# Altium PCB Ada.PcbDoc
Units mm, origin at the board's own origin, x right, y up, seen from the top; angles counter-clockwise.
Board outline 39.5 x 32.44 mm, 2 copper layers (Top Layer, Bottom Layer), stack 1.619 mm thick; 23 components, 15 nets, 70 pads, 12 vias.
Unrouted connection lines stored in the file: 72.
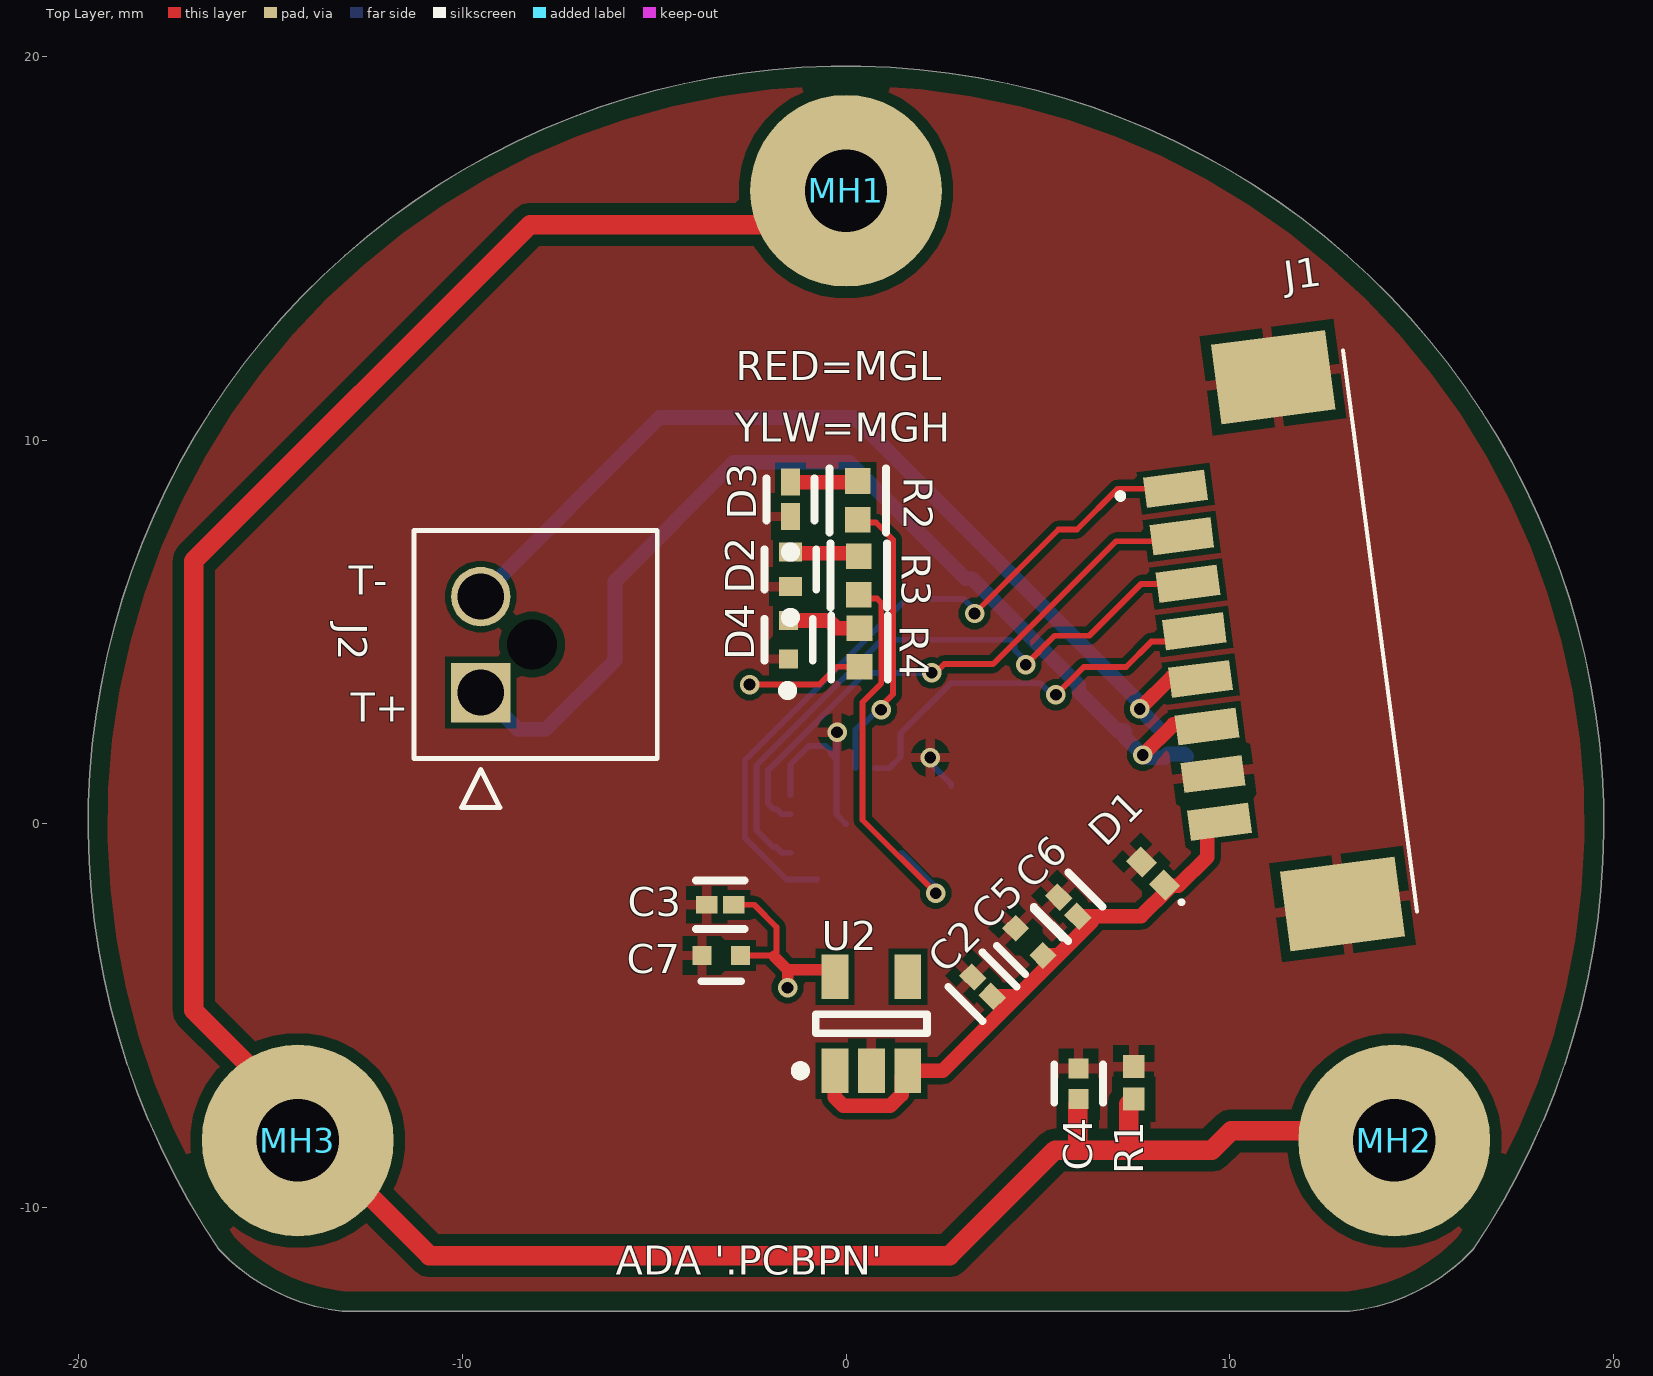
[diagram p0: Top Layer view]
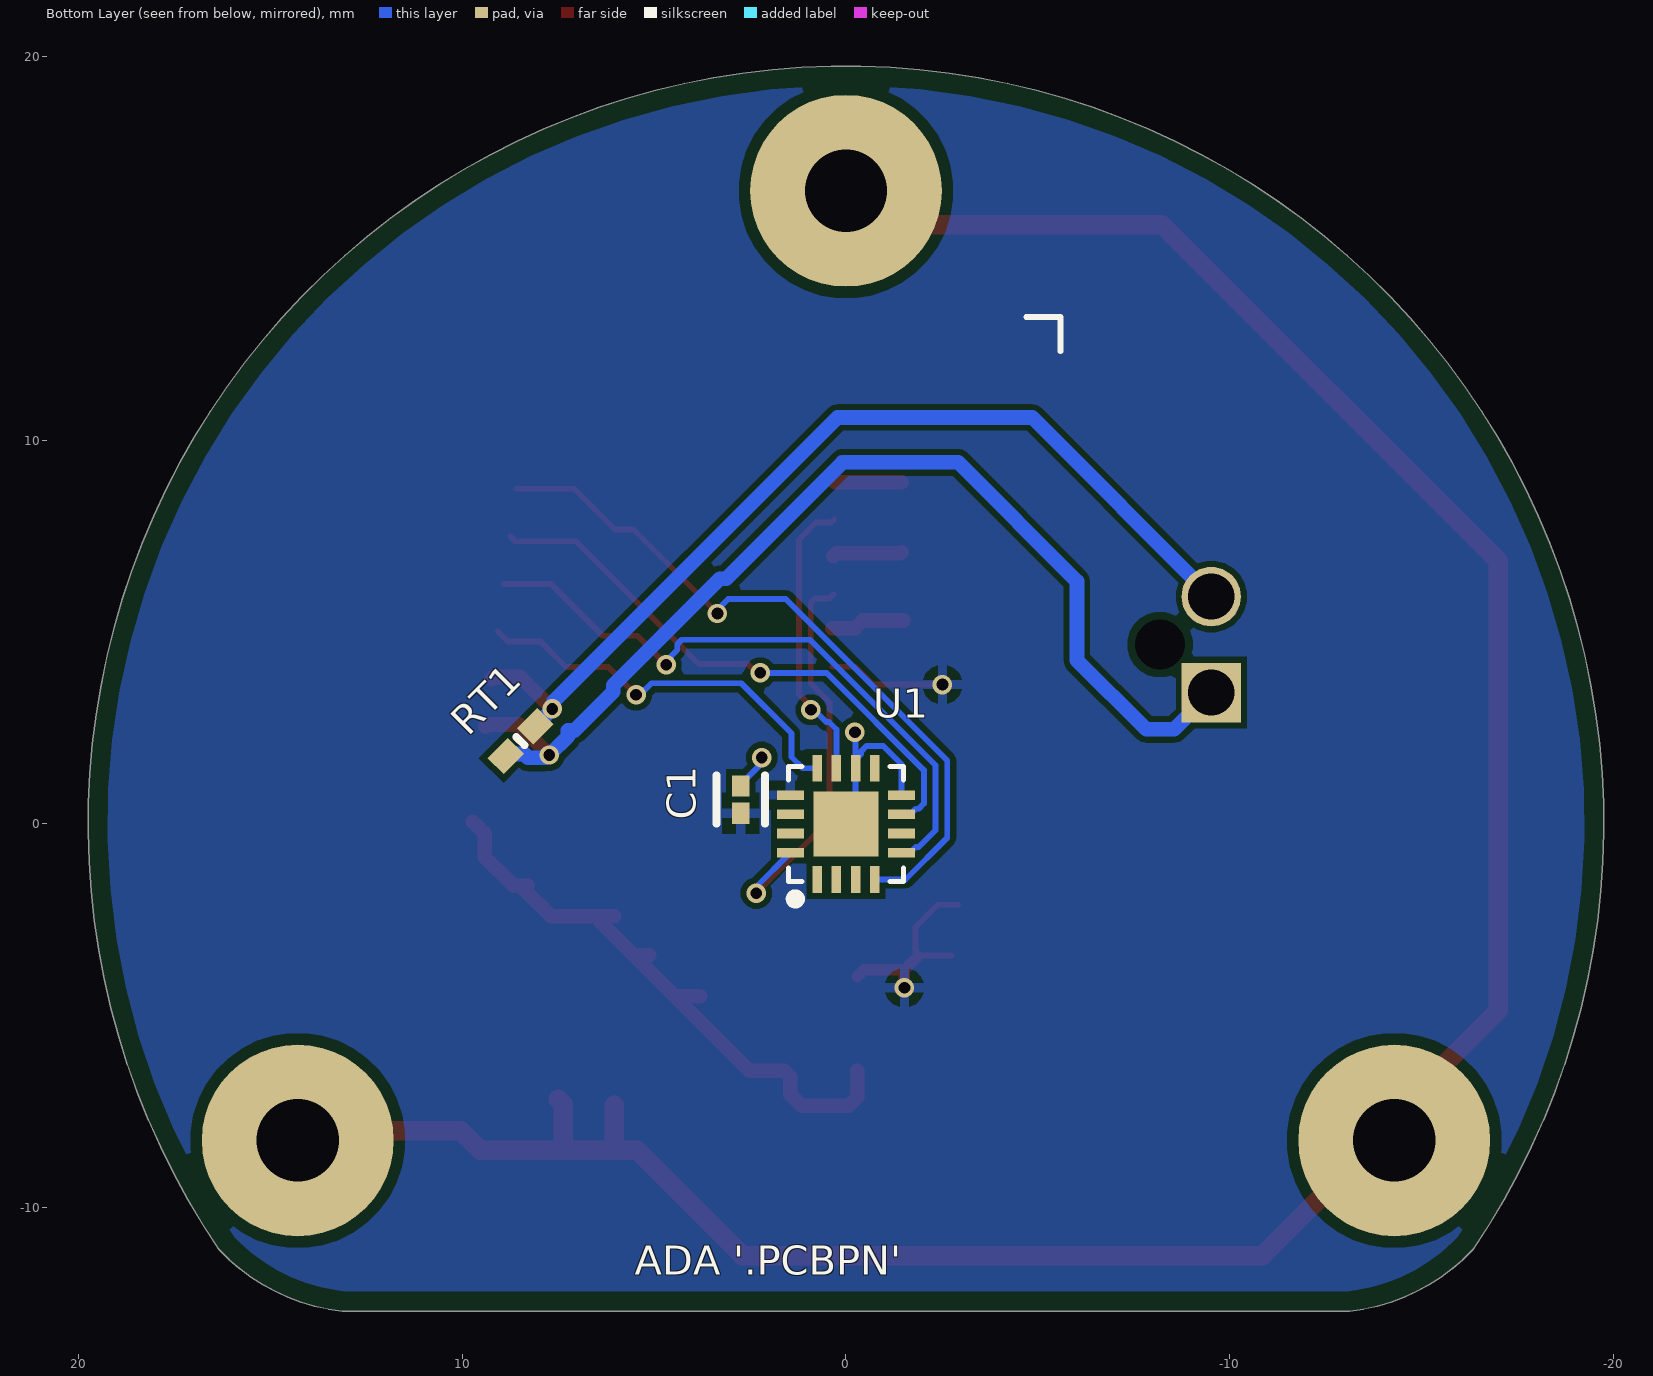
[diagram p1: Bottom Layer view, seen from below]
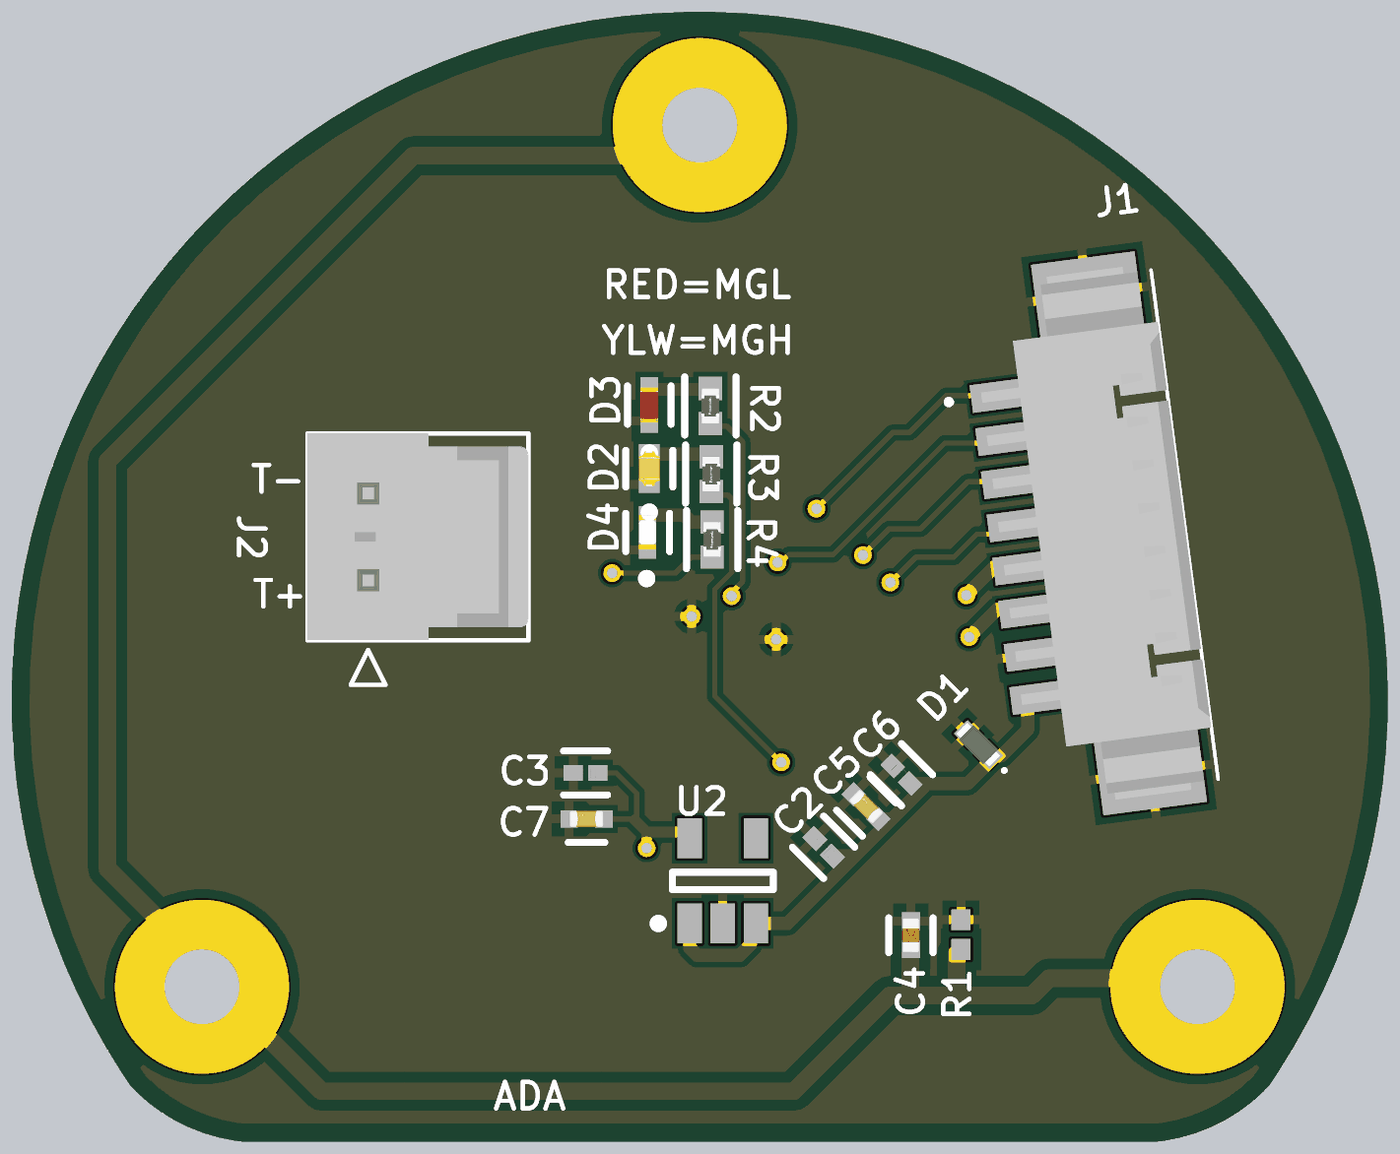
[diagram p2: 3D render of the assembled board from above, using the file's embedded part models]
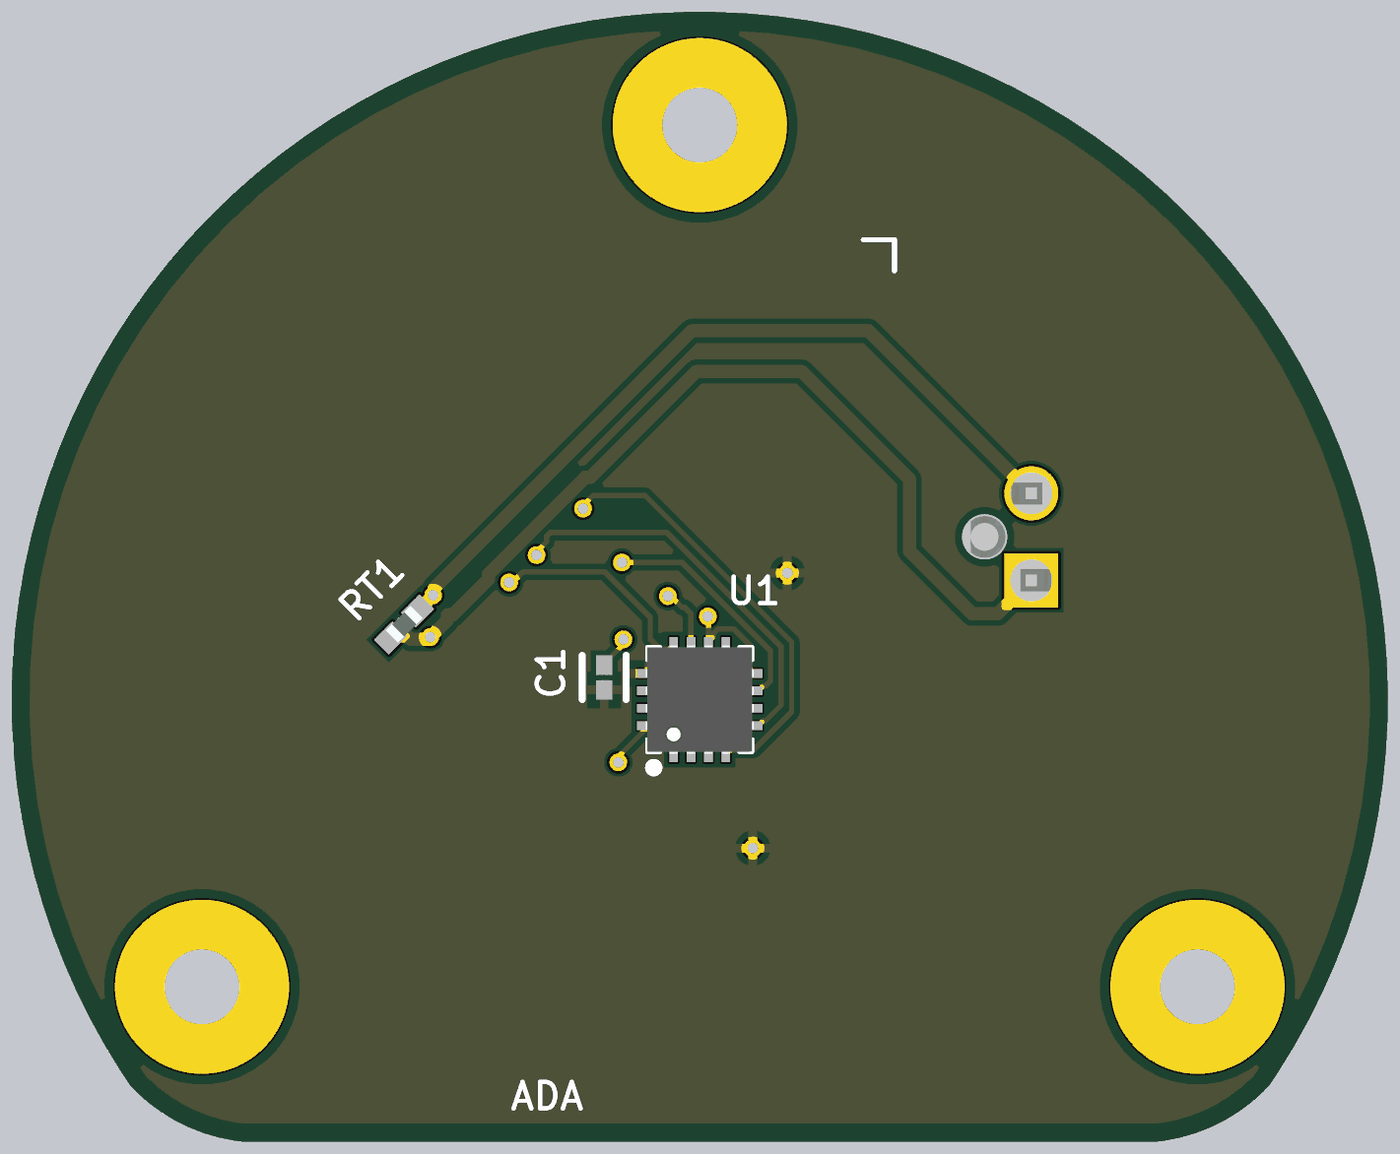
[diagram p3: 3D render of the assembled board from below, using the file's embedded part models]

## Layer stack, top to bottom
Top Solder: solder mask 0.0254, SM-003, Dk 4
Top Layer: signal copper 0.0343
Core1: core 1.55, 370HR, Dk 4.6
Bottom Layer: signal copper 0.0343
Bottom Solder: solder mask 0.0254, SM-003, Dk 4

## Board outline
-16.336,-11.1 ccw(c-12.569,-7.549) -13.129,-12.695 10.104,-12.695 13.129,-12.695 ccw(c12.569,-7.549) 16.336,-11.1 ccw(c0,0)

## Design rules (kind name [scope] priority, off if disabled: settings)
AcuteAngle [All] p1: minimum=6.00000000000000E+0001 checktracksonly=FALSE
AssemblyTestPointUsage [All] p1: allowmultiple=TRUE
AssemblyTestpoint "AssemblyTestpoint - Gorilla" [All] p1: testpointundercomponent=FALSE minsize=0.559 maxsize=2.54 preferedsize=1.524 minholesize=0 maxholesize=1.016 preferedholesize=0.813 testpointgrid=0.127 usegrid=FALSE gridoriginx=12.778 gridoriginy=12.772 gridtolerance=0 allowsidetop=TRUE allowsidebottom=TRUE minspacing=0.127
AssemblyTestpoint "AssemblyTestpoint - Whizz" [All] p2 off: testpointundercomponent=FALSE minsize=0.66 maxsize=2.54 preferedsize=1.524 minholesize=0 maxholesize=1.016 preferedholesize=0.813 testpointgrid=0.127 usegrid=FALSE gridoriginx=12.778 gridoriginy=12.772 gridtolerance=0 allowsidetop=TRUE allowsidebottom=TRUE minspacing=0.127
BoardOutlineClearance [All] p1: gap=0.203 ignorepadtopadclearanceinfootprint=FALSE except(0.254: Text-OutlineEdge; 0.508: Arc-OutlineEdge Track-OutlineEdge SMDPad-OutlineEdge THPad-OutlineEdge Via-OutlineEdge Fill-OutlineEdge Poly-OutlineEdge Region-OutlineEdge)
Clearance Clearance31-100V [(InNetClass('Chassis')) vs NOT (InNetClass('Chassis'))] p1: gap=0.635 ignorepadtopadclearanceinfootprint=FALSE // Outside clearance per IPC-2221
Clearance Clearance_non_plated [(HoleDiameter > 0) And (PadIsPlated = 'False')] p2: gap=0.203 ignorepadtopadclearanceinfootprint=FALSE except(0: Arc-Hole Track-Hole SMDPad-Hole THPad-Hole Via-Hole Fill-Hole Poly-Hole Region-Hole Text-Hole)
Clearance Clearance100OhmDiff [(InDifferentialPairClass('All Differential Pairs')) vs (Not (InDifferentialPairClass('All Differential Pairs'))) And Not InNetClass('Power')] p3: gap=0.508 ignorepadtopadclearanceinfootprint=FALSE except(0: Arc-Hole Track-Hole SMDPad-Hole THPad-Hole Via-Hole Fill-Hole Poly-Hole Region-Hole Text-Hole)
Clearance Clearance50OhmSE [InNetClass('SE50Ohm') vs Not InNetClass('SE50Ohm') And Not InNetClass('Power')] p4: gap=0.508 ignorepadtopadclearanceinfootprint=FALSE except(0: Arc-Hole Track-Hole SMDPad-Hole THPad-Hole Via-Hole Fill-Hole Poly-Hole Region-Hole Text-Hole)
Clearance Clearance_Outerlayer [OnOutside] p5: gap=0.152 ignorepadtopadclearanceinfootprint=FALSE
Clearance Clearance_Innerlayer [OnMid] p6: gap=0.152 ignorepadtopadclearanceinfootprint=FALSE
DiffPairsRouting 100OhmDiffPairsRouting [InDifferentialPairClass('All Differential Pairs')] p1: maxlimit=0.254 minlimit=0.127 mostfreqgap=0.191 toplayer_minwidth=0.127 toplayer_maxwidth=0.381 toplayer_prefwidth=0.159 bottomlayer_minwidth=0.127 bottomlayer_maxwidth=0.381 bottomlayer_prefwidth=0.159 maxuncoupledlength=12.7
FabricationTestPointUsage [All] p1: valid=0 allowmultiple=TRUE
FabricationTestpoint [All] p1: side=3 testpointundercomponent=TRUE minsize=0.127 maxsize=2.54 preferedsize=1.524 minholesize=0 maxholesize=1.016 preferedholesize=0.813 testpointgrid=0.127 allowsidetop=TRUE allowsidebottom=TRUE usegrid=FALSE gridoriginx=12.778 gridoriginy=12.772 gridtolerance=0
FanoutControl Fanout_Small [(CompPinCount < 5)] p4: bgadir=Out bgaviamode=Centered fanoutstyle=Auto fanoutdirection=OutOnly viagrid=0.025 // Fanout_Small (Default Rule)
Height [All] p1: minheight=0 maxheight=76.2 prefheight=12.7
HoleSize [All] p1: absolutevalues=TRUE maxlimit=3.962 minlimit=0.203 maxpercent=80.000 minpercent=20.000
MatchedLengths [All] p1: tolerance=2.54 checknetsindiffpair=TRUE checkdiffpairvsdiffpair=FALSE checkxsignals=FALSE checkothers=FALSE
MinimumAnnularRing [All] p1: minimumring=0.089
MinimumSolderMaskSliver [All] p1: minsoldermaskwidth=0.076
PermittedLayers ThroughHole [IsDIP] p1: toplayerpermitted=TRUE bottomlayerpermitted=FALSE // Single sided through hole only
PermittedLayers [All] p2: toplayerpermitted=TRUE bottomlayerpermitted=TRUE
PlaneClearance [All] p1: clearance=0.203
PolygonConnect [All] p1: connectstyle=Relief reliefconductorwidth=0.254 reliefentries=4 polygonreliefangle="90 Angle" airgapwidth=0.254
RoutingVias [All] p1: holewidth=0.305 width=0.508 viastyle="Through Hole" minholewidth=0.203 minwidth=0.406 maxholewidth=0.457 maxwidth=0.66
SMDEntry [All] p1: side=TRUE corner=TRUE anyangle=TRUE
SMDNeckDown "SMDNeckDown SolderBump" [HasFootprintPad('SolderBump','1')=True] p1: percent=200.000
SMDNeckDown [(HasFootprintPad('SolderBump','1')=False) and (IsPad=true)] p2: percent=75.000
SMDToCorner [All] p1: distance=100000
SilkToSilkClearance [All] p1: silktosilkclearance=0
SilkToSolderMaskClearance [IsPad] p1: minsilkscreentomaskgap=0.025 clearancetoexposedcopper=FALSE
SolderMaskExpansion [All] p1: expansion=0.076 istentingtop=FALSE
ViasUnderSMD [All] p1: allowed=FALSE
Width Width100OhmDiff [(InDifferentialPairClass('All Differential Pairs'))] p1: maxlimit=25.4 minlimit=0.127 preferedwidth=0.159 minimp=50.000000 maximp=50.000000 favimp=50.000000
Width Width50Ohm [InNetClass('SE50ohm')] p2: maxlimit=0.241 minlimit=0.127 preferedwidth=0.241 minimp=50.000000 maximp=50.000000 favimp=50.000000
Width Width_Innerlayer [OnMid] p3: maxlimit=25.4 minlimit=0.102 preferedwidth=0.127
Width Width__Outerlayer [OnOutside] p4: maxlimit=25.4 minlimit=0.127 preferedwidth=0.152
18 further rules are at their usual default settings.

## Classes and differential pairs
net class Chassis: NetC4_1

## Components (designator, comment, footprint, x,y, rotation, side; value= is the part's Value field where it differs from the comment)
C1 "CL03A105MQ3CSNC" FP-CL03-IPC_A 2.743,0.635 r90 bottom
C2 "CL03A105MQ3CSNC" FP-CL03-IPC_A 3.556,-4.242 r135 top
C3 "CL03A105MQ3CSNC" FP-CL03-IPC_A -3.277,-2.108 r180 top
C4 "C0402C103M5RACTU" FP-C0402-BB-MFG 6.062,-6.77 r90 top value="10,000 pF"
C5 "CC0402KRX5R9BB104" FP-CC0402-MFG 4.775,-3.073 r135 top value="100 nF"
C6 "CL03A105MQ3CSNC" FP-CL03-IPC_A 5.791,-2.159 r135 top
C7 "CC0402KRX5R9BB104" FP-CC0402-MFG -3.251,-3.429 r180 top value="100 nF"
D1 "RCLAMP1521PQTCT" RCLAMP1521PQTCT 8.001,-1.295 r135 top locked
D2 "SML-P11DTT86R" FP-SML-P11-MFG -1.448,6.633 r90 top
D3 "APHHS1005SURCK" FP-APHHS1005SURCK-MFG -1.448,8.458 r90 top
D4 "QBLP595-IB" FP-QBLP595-IB-MFG -1.499,4.801 r90 top
J1 "10114830-11108LF" 1011483011108LF 11.836,4.75 r97.5 top locked
J2 "1053092302" 105309YY02_U -9.519,3.424 r90 top
MH1 "MH" MH_1.6MM#1 0,13.429 r0 top
MH2 "MH" MH_1.6MM#2 5.933,-8.25 r0 top
MH3 "MH" MH_1.6MM#3 4.176,-6.378 r0 top
R1 "432K" RESC1005X40X25NL05T10 7.5,-6.75 r270 top
R2 "ERJ-2RKF2000X" FP-ERJ2RK-IPC_A 0.305,8.433 r90 top
R3 "ERJ-2RKF2000X" FP-ERJ2RK-IPC_A 0.33,6.477 r90 top
R4 "ERJ-2RKF2000X" FP-ERJ2RK-IPC_A 0.356,4.597 r90 top
RT1 "NCP15XH103F03RC" THRMC1005X55N 8.484,2.159 r135 bottom
U1 "SENSOR_MPS_MA732" QFN50P300X300X100-16-TP 0,0 r90 bottom locked
U2 "ADP150AUJZ-3.3-R7" ADI-UJ-5_M 0.66,-5.207 r90 top

## Footprints (in the part's own frame and the unit in brackets; to place one, negate y for a bottom-side part, rotate by r counter-clockwise, add the part's x,y. Pads: shape width x height; smd on the part's side, far side on the other; paste and mask are expansions set on the pad)
105309YY02_U [mm]
  rect 1.55x1.55 hole 1.2: 1(0,0)
  round 1.55 hole 1.2: 2(2.5,0)
  round 0.65 hole 1.3 unplated: 3(1.25,-1.34)
  silkscreen extent -3,-4.6 4.22,1.74, body extent -1.72,-4.6 4.22,1.74, height 10.52
1011483011108LF [mm]
  rect 0.8x1.6 smd: 1(4.375,2.7) 2(3.125,2.7) 3(1.875,2.7) 4(0.625,2.7) 5(-0.625,2.7) 6(-1.875,2.7) 7(-3.125,2.7) 8(-4.375,2.7)
  rect 2.1x3 smd: MP1(6.925,-0.2) MP2(-6.925,-0.2)
  silkscreen extent -7.38,-2.1 7.37,4.2, body extent -7.57,-2.1 7.58,3.2, height 3.49
ADI-UJ-5_M [mm] "SOT23, 5-Leads, Body 2.9x1.6mm, Pitch 0.95mm, IPC Low Density"
  rect 1.15x0.7 smd: 1(-1.225,0.95) 2(-1.225,0) 3(-1.225,-0.95) 4(1.225,-0.95) 5(1.225,0.95)
  silkscreen extent -1.35,-1.45 0.25,1.97, body extent -0.8,-1.45 0.8,1.45, height 1
FP-APHHS1005SURCK-MFG [mm]
  rect 0.7x0.5 smd paste+0 mask+0: 1(-0.45,0) 2(0.45,0)
  silkscreen extent -1.5,-0.63 0.55,0.63, body extent -0.9,-0.4 0.9,0.4, height 0.25
FP-C0402-BB-MFG [mm]
  rect 0.52x0.52 smd paste+0 mask+0: 1(-0.4,0) 2(0.4,0)
  silkscreen extent -0.5,-0.64 0.5,0.64, body extent -0.8,-0.4 0.8,0.4, height 0.25
FP-CC0402-MFG [mm]
  rect 0.5x0.5 smd paste+0 mask+0: 1(-0.5,0) 2(0.5,0)
  silkscreen extent -0.53,-0.68 0.53,0.67, body extent -0.87,-0.47 0.87,0.47, height 0.25
FP-CL03-IPC_A [mm]
  rect 0.554x0.463 smd paste+0 mask+0: 1(-0.354,0) 2(0.354,0)
  silkscreen extent -0.63,-0.63 0.63,0.63, body extent -0.3,-0.15 0.3,0.15, height 0.33
FP-ERJ2RK-IPC_A [mm]
  rect 0.668x0.672 smd paste+0 mask+0: 1(-0.502,0) 2(0.502,0)
  silkscreen extent -0.84,-0.74 0.84,0.74, body extent -1.04,-0.54 1.04,0.54, height 0.25
FP-QBLP595-IB-MFG [mm]
  rect 0.5x0.5 smd paste+0 mask+0: 1(-0.5,0) 2(0.5,0)
  silkscreen extent -1.45,-0.63 0.55,0.63, body extent -0.85,-0.4 0.85,0.4, height 0.25
FP-SML-P11-MFG [mm]
  rect 0.5x0.6 smd paste+0 mask+0: 1(-0.45,0) 2(0.45,0)
  silkscreen extent -1.37,-0.67 0.53,0.67, body extent -0.8,-0.43 0.8,0.43, height 0.25
MH_1.6MM#1 [mm]
  round 5 hole 2.15 mask+0.05: 1(0,3.071)
MH_1.6MM#2 [mm]
  round 5 hole 2.15 mask+0.05: 1(8.356,0)
MH_1.6MM#3 [mm]
  round 5 hole 2.15 mask+0.05: 1(-18.465,-1.872)
QFN50P300X300X100-16-TP [mm]
  rect 0.7x0.25 smd mask+0.051: 1(-1.45,0.75) 2(-1.45,0.25) 3(-1.45,-0.25) 4(-1.45,-0.75) 9(1.45,-0.75) 10(1.45,-0.25) 11(1.45,0.25) 12(1.45,0.75)
  rect 0.25x0.7 smd mask+0.051: 5(-0.75,-1.45) 6(-0.25,-1.45) 7(0.25,-1.45) 8(0.75,-1.45) 13(0.75,1.45) 14(0.25,1.45) 15(-0.25,1.45) 16(-0.75,1.45)
  rect 1.7x1.7 smd paste-1.7 mask+0.051: 17(0,0)
  silkscreen extent -2.08,-1.5 1.5,1.5, body extent -1.55,-1.55 1.55,1.55, height 1
RCLAMP1521PQTCT [mm]
  rect 0.6x0.55 smd: 1(-0.425,0) 2(0.425,0)
  silkscreen extent -1.1,-0.05 -1,0.05, body extent -0.67,-0.3 0.67,0.3, height 0.65
RESC1005X40X25NL05T10 [mm] "Chip Resistor, 2-Leads, Body 1.00x0.50mm, IPC Medium Density"
  rect 0.6x0.55 smd: 1(-0.425,0) 2(0.425,0)
  body extent -0.53,-0.27 0.53,0.28, height 0.4
THRMC1005X55N [mm]
  rect 0.75x0.6 smd: 1(-0.55,0) 2(0.55,0)
  silkscreen extent 0,-0.15 0,0.15, body extent -0.5,-0.25 0.5,0.25, height 0.55

## Part data
C1 C2 C3 C6: library part CMP-13271-003873-1, "Cap Ceramic 1uF 6.3V X5R ±20% Pad SMD 0201 +85°C T/R", Capacitance=1uF, Case Code (Imperial)=0201, Case Code (Metric)=0603, Dielectric=X5R, Max Operating Temperature=85°C, Min Operating Temperature=-55°C, Package Quantity=1, Tolerance=20%, Voltage Rating=6.3V, Case/Package=0201, Depth=0.3mm, Lead Free="Lead Free", Length=0.024inch, Mount="Surface Mount", Packaging="Tape and Reel", Thickness=0.013inch, Width=0.012inch
C4: library part CMP-1034-01887-3, "CAP CER 10000PF 50V 20% X7R 0402", Capacitance="10,000 pF", Manufacturer=Kemet, Package=C0402-BB, Temperature="-55°C to +125°C", Temperature Characteristic=X7R, Temperature Coefficient=15%, Temperature Range High=+125°C, Temperature Range Low=-55°C, Tolerance=0.2, Voltage Rating="50 V", Automotive=No, Category=Cap, ComponentLink2Description=Datasheet, ComponentLink2URL=https://content.kemet.com/datasheets/KEM_C1002_X7R_SMD.pdf, Device Class L1="Passive Components", Device Class L2=Capacitors, Device Class L3="Ceramic Capacitors", Digikey Description="CAP CER 10000PF 50V 20% X7R 0402", Height=0.55mm, Ipc Land Pattern Name=CAPC10050X50, Lead Free=Yes, Manufacturer Part Number=C0402C103M5RACTU, Material=Ceramic, Mouser Description="Cap Ceramic 0.01uF 50V X7R 20% SMD 1.0 x 0.5 mm 125 C Paper T/R", Octopart=https://octopart.com/c0402c103m5ractu-kemet-17125571, RoHS=TRUE
C5 C7: library part CMP-03422-000742-1, "CAP CER 0.1UF 50V X5R 0402", Capacitance="100 nF", Manufacturer=YAGEO, Package=CC0402, Temperature="-55°C to +125°C", Temperature Characteristic=X5R, Temperature Coefficient=30ppm/°C, Temperature Range High=+125°C, Temperature Range Low=-55°C, Tolerance=0.1, Voltage Rating="50 V", Automotive=No, Automotive Grade=NA, Category=Cap, ComponentLink2Description=Datasheet, ComponentLink2URL=http://www.yageo.com/documents/recent/UPY-GP_NP0_16V-to-50V_16.pdf, Device Class L1="Passive Components", Device Class L2=Capacitors, Device Class L3="Ceramic Capacitors", Digikey Description="CAP CER 0.1UF 50V X5R 0402", Footprint Url=http://www.yageo.com/exep/pages/download/literatures/UPY-C_GEN_24.pdf, Height=0.55mm, Ipc Land Pattern Name=CAPC10050X50, Lead Free=Yes, Manufacturer Part Number=CC0402KRX5R9BB104, Material=Ceramic, Octopart=https://octopart.com/cc0402krx5r9bb104-yageo-33978688, RoHS=TRUE
D1: "TVS Diode (Bi-directional)", Manufacturer_Name=SEMTECH, Mouser Part Number=947-RCLAMP1521PQTCT, Arrow Part Number=RCLAMP1521PQTCT, Arrow Price/Stock=https://www.arrow.com/en/products/rclamp1521pqtct/semtech, Datasheet Link=https://www.arrow.com/en/products/rclamp1521pqtct/semtech, Height=0.55mm, Manufacturer_Part_Number=RCLAMP1521PQTCT, Mouser Price/Stock=https://www.mouser.co.uk/ProductDetail/Semtech/RCLAMP1521PQTCT/?qs=rBWM4%252BvDhIejX164RfHkPw%3D%3D
D2: library part CMP-08952-000022-1, "LED ORANGE CLEAR 1006 SMD", Colour=Orange, Forward Current=1mA, Forward Voltage=1.9V, Manufacturer=Rohm, Package=SML-P11, Power Dissipation=52mW, Reverse Voltage=5V, Temperature="-40°C to +85°C", Temperature Range High=+85°C, Temperature Range Low=-40°C, Automotive=No, Category=Diode, ComponentLink2Description=Datasheet, ComponentLink2URL=https://d1d2qsbl8m0m72.cloudfront.net/en/products/databook/datasheet/opto/led/chip_mono/sml-p11-e.pdf, Device Class L1=Optoelectronics, Device Class L2=LEDs, Device Class L3=unset, Digikey Description="LED ORANGE CLEAR 1006 SMD", Height=0.25mm, Lead Free=Yes, Led Orientation="Top View", Luminous Intensity=7.3mcd, Manufacturer Part Number=SML-P11DTT86R, Mouser Description="LED Uni-Color Orange 2-Pin Chip 0402(1006Metric) T/R", Octopart=https://octopart.com/sml-p11dtt86r-rohm-34112313, RoHS=TRUE, Wavelength=605nm
D3: library part CMP-2000-05787-2, "LED RED CLEAR CHIP SMD", Case Code (Imperial)=0402, Case Code (Metric)=1005, Color=Red, Forward Current=20mA, Forward Voltage=1.95V, Lens Color=Clear, Max Operating Temperature=85°C, Min Operating Temperature=-40°C, Package Quantity=2000, Case/Package=0402, Dominant Wavelength=630nm, Height=0.6mm, Illumination Color=Red, Lead Free="Lead Free", Length=1mm, Lens Style=Clear, Luminous Intensity=220mcd, Mount="Surface Mount", Number of LEDs=1, Number of Pins=2, Packaging="Tape and Reel", Test Current=20mA, Viewing Angle=120°, Wavelength=635nm, Width=0.5mm
D4: library part CMP-113271-000002-1, "LED BLUE CLEAR 0402 SMD", Case Code (Imperial)=0402, Case Code (Metric)=1005, Color=Blue, Forward Voltage=3.1V, Lens Color=Colorless, Test Current=20mA, Case/Package=0402, Dominant Wavelength=465nm, Height=0.6mm, Length=1mm, Lens Size=0.5mm, Lens Style=Flat, Lens Transparency=Clear, Luminous Intensity=85mcd, Mount="Surface Mount", Packaging="Tape and Reel", Viewing Angle=140°, Width=0.5mm
J1: "Connector", Manufacturer_Name=Amphenol, Mouser Part Number=649-10114830-11108LF, Datasheet Link=https://cdn.amphenol-icc.com/media/wysiwyg/files/drawing/10114830.pdf, Height=3.4mm, Manufacturer_Part_Number=10114830-11108LF, Mouser Price/Stock=https://www.mouser.co.uk/ProductDetail/Amphenol-FCI/10114830-11108LF?qs=SqJKR5Mmryf8jaiAqFrwwQ%3D%3D
J2: "Connector", Manufacturer_Name=Molex, Datasheet Link=https://www.molex.com/pdm_docs/sd/1053091102_sd.pdf, Height=10.51mm, Manufacturer_Part_Number=1053092302
MH1 MH2 MH3: library part 144, "MOUNTING HOLE, M1.6, 4.0mm PAD", ID=144, Status=Released
R1: library part CMP-2002-07684-1, Manufacturer=Yageo, Part Number=RC0402FR-07432KL
R2 R3 R4: library part CMP-2002-00757-2, "RES SMD 200 OHM 1% 1/10W 0402", Case Code (Imperial)=0402, Case Code (Metric)=1005, Max Operating Temperature=155°C, Max Power Dissipation=100mW, Min Operating Temperature=-55°C, Package Quantity=1, Resistance=200R, Resistance Tolerance=1%, Resistor Type="Thick Film", Temperature Coefficient=100ppm/°C, Voltage Rating=50V, Case/Package=0402, Construction=Rectangular, Contact Plating=Tin, Depth=0.5mm, Features="Automotive AEC-Q200", Height=0.35mm, Lead Free="Lead Free", Length=1mm, Military Standard=Not, Mount="Surface Mount", Number of Terminations=2, Packaging="Tape and Reel", Power Rating=100mW, Radiation Hardening=No, REACH SVHC="No SVHC", RoHS Compliant=Yes, Series=ERJ, Size Code=0402, Technology="THICK FILM", Termination=SMD/SMT, Tolerance=1%, Voltage Rating (DC)=50V, Width=0.02inch
RT1: "Thermistor", Manufacturer_Name="Murata Electronics", Mouser Part Number=81-NCP15XH103F03RC, Arrow Part Number=NCP15XH103F03RC, Arrow Price/Stock=https://www.arrow.com/en/products/ncp15xh103f03rc/murata-manufacturing?region=nac, Datasheet Link=https://datasheet.datasheetarchive.com/originals/distributors/Datasheets_SAMA/616ff9b704eea4ec1739d2fdac2a983c.pdf, Height=0.55mm, Manufacturer_Part_Number=NCP15XH103F03RC, Mouser Price/Stock=https://www.mouser.co.uk/ProductDetail/Murata-Electronics/NCP15XH103F03RC?qs=fKZN0AlWj%2F2mA3qn9WuQPw%3D%3D
U1: library part 165, "SENSOR, ANGLE, 9 BIT TO 14 BIT RESOLUTION, 14-BIT PWM OUTPUT, 3.3V, 12mA, QFN-16", OPERATING TEMPERATURE="-40°C to +125°C", Package=QFN-16, VOLTAGE - SUPPLY=3.3V, Category=Sensors, ComponentLink1Description=Datasheet, ComponentLink1URL=https://www.monolithicpower.com/en/documentview/productdocument/index/version/2/document_type/Datasheet/lang/en/sku/MA732/document_id/5009/, Height=1mm, HEIGHT (MAX)=1mm, ID=165, MFG=MPS, MFG P/N=MA732, Mounting Type="Surface Mount", RoHS Compliant=Yes, SENSOR TYPE="Angle Sensor", Status=Released
U2: library part CMP-0786-00394-1, "Ultralow Noise, 150 mA CMOS Linear Regulator, 2.2 to 5.5 V Vin, 3.3 V Vout, Industrial, 5-pin SOT23 (UJ-5), Reel", Manufacturer="Analog Devices", Preset Vout Values (V)=3.3, Supply Current IGND @ Small Load=10uA, Code_JEDEC=MO-193-AB, ComponentLink1Description="Manufacturer URL", ComponentLink1URL=http://www.analog.com/en/index.html, ComponentLink2Description=Datasheet, ComponentLink2URL=http://www.analog.com/static/imported-files/data_sheets/ADP150.pdf, ComponentLink3Description="Package Specification", ComponentLink3URL=http:/www.analog.com/static/imported-files/packages/PKG_PDF/TSOT(UJ)/UJ_5.pdf, ComponentLink4Description="URL Link1", ComponentLink4URL="Product URL:http://www.analog.com/en/ADP150/productSearch.html", DatasheetVersion="Rev. A", Iout max=150mA, Mounting Technology="Surface Mount", PackageDescription="5-Pin Thin Small Outline Transistor Package, Body 2.9 x 1.6 mm, Pitch 0.95 mm", PackageReference=UJ-5, PackageVersion="100708-A, 10/2008", Packing=Reel, PartNumber=ADP150AUJZ-3.3-R7, Vin (max) (V)=5.5, Vin (min) (V)=2.2

## Via types
v1: diameter 0.508, hole 0.305, Top Layer to Bottom Layer, 12 vias

## Nets (pads, with @x,y where several pads share a name; then routed paths per layer and width w, separated by ;. In a path a pad name is that pad's centre, name@x,y a point inside that pad or via, vN(x,y) a via of type N, cw(c..) or ccw(c..) an arc to the next point about the centre after c; other vN are vias at no path point)
3v3: C1.1 C3.1 C7.1 R4.1 U1.13 U2.5 | length 8.3
  Top Layer w0.152: C3.1 -2.391,-2.108 -1.809,-2.69 -1.809,-3.34 -1.898,-3.429 ; C7.1 -1.898,-3.429 ; v1(-2.515,3.632) -0.698,3.632 -0.235,4.095 R4.1 ; -1.873,-3.455 -1.898,-3.429
  Top Layer w0.3: -1.873,-3.455 -1.524,-3.804 ; v1(-1.524,-4.267) -1.524,-3.804 ; U2.5 -0.468,-3.804 -1.524,-3.804
5Vin: C2.1 C5.1 C6.1 D1.1 J1.8 U2.1 U2.3 | length 16
  Top Layer w0.381: U2.1 -0.29,-7.127 -0.066,-7.35 1.152,-7.35 1.451,-7.051 1.451,-6.592 U2.3 2.526,-6.432 4.465,-4.492 ; C2.1 4.465,-4.492 ; C5.1 5.531,-3.427 ; C6.1 6.406,-2.41 7.687,-2.41 D1.1@8.42,-1.676 ; 6.406,-2.552 5.531,-3.427 ; D1.1 8.319,-1.614 8.663,-1.614 9.412,-0.864 9.412,-0.251 9.723,0.06 J1.8 ; 4.465,-4.492 5.531,-3.427
CS: J1.3 U1.5 | length 16.7
  Top Layer w0.152: v1(4.683,4.15) 5.436,4.902 6.34,4.902 7.694,6.256 J1.3
  Bottom Layer w0.152: U1.5 -1.675,-0.75 -1.821,-0.604 -1.895,-0.604 -2.333,-0.165 -2.333,1.527 0.94,4.801 4.284,4.801 4.4,4.685 4.4,4.53 4.683,4.246 v1(4.683,4.15)
GND: C1.2 C2.2 C3.2 C4.2 C5.2 C6.2 C7.2 D1.2 D2.1 D3.1 D4.1 J1.7 J1.MP1 J1.MP2 R1.1 U1.8 U1.10 U1.17 U2.2 | length 5.9
  Bottom Layer w0.152: U1.8 -1.45,1.548 -0.97,2.029 -0.53,2.029 -0.396,1.895 -0.396,1.821 U1.10@-0.25,1.675 ; v1(-0.233,2.388) -0.25,2.37 U1.10@-0.25,1.675 ; U1.17 -0.25,0.25 U1.10 U1.10@-0.25,1.675 ; v1(2.193,1.728) 2.261,1.66 2.261,1.517 2.743,1.035 C1.2
MGH: R3.1 U1.16 | length 10.7
  Top Layer w0.152: R3.1 0.431,5.874 0.806,5.874 0.92,5.76 0.92,3.66 0.432,3.172 0.432,0.102 v1(2.337,-1.803)
  Bottom Layer w0.152: U1.16 2.357,-1.657 2.357,-1.783 v1(2.337,-1.803)
MGL: R2.1 U1.11 | length 7.6
  Top Layer w0.152: R2.1 0.383,7.852 0.78,7.852 1.225,7.407 1.225,3.379 0.914,3.068 v1(0.914,2.972)
  Bottom Layer w0.152: U1.11 0.25,2.46 0.443,2.653 0.515,2.653 0.834,2.972 v1(0.914,2.972)
MISO: J1.2 U1.7 | length 14.9
  Top Layer w0.152: v1(2.235,3.937) 2.331,3.937 2.56,4.166 3.836,4.166 7.036,7.366 8.622,7.366 J1.2
  Bottom Layer w0.152: U1.7 -1.675,0.25 -1.821,0.396 -1.895,0.396 -2.029,0.53 -2.029,1.401 0.508,3.937 v1(2.235,3.937)
MOSI: J1.1 U1.4 | length 18.9
  Top Layer w0.152: v1(3.35,5.483) 5.537,7.671 6.02,7.671 7.084,8.735 J1.1
  Bottom Layer w0.152: U1.4 -1.548,-1.45 -2.638,-0.36 -2.638,1.653 1.57,5.861 3.068,5.861 3.35,5.58 v1(3.35,5.483)
NetC4_1: C4.1 MH1.1 MH2.1 MH3.1 R1.2 | length 72.1
  Top Layer w0.152: 5.45,-8.5 5.45,-8.324 ; 6.039,-8.5 6.062,-8.478 ; R1.2@7.495,-7.17 R1.2
  Top Layer w0.508: MH3.1 MH3.1@-14.145,-8.25 ; MH3.1@-13.856,-8.25 -10.856,-11.25 2.7,-11.25 5.45,-8.5 6.039,-8.5 ; MH3.1@-13.856,-8 -17,-4.856 -17,6.851 -8.23,15.621 -0.379,15.621 MH1.1@0,16 ; C4.1@6.039,-7.334 6.039,-8.5 ; R1.2@7.5,-7.179 7.373,-7.306 7.373,-8.5 ; MH2.1@15.5,-8.75 14.75,-8 10.035,-8 9.535,-8.5 7.373,-8.5 ; 6.039,-8.5 7.373,-8.5
NetD2_2: D2.2 R3.2 | length 1.8
  Top Layer w0.381: D2.2 -1.419,7.054 -1.323,7.054 0.255,7.054 R3.2
NetD3_2: D3.2 R2.2 | length 1.8
  Top Layer w0.381: D3.2 0.278,8.908 R2.2
NetD4_2: D4.2 R4.2 | length 1.9
  Top Layer w0.381: D4.2 -0.436,5.301 -0.235,5.1 R4.2
SCLK: J1.4 U1.12 | length 10.4
  Top Layer w0.152: v1(5.471,3.363) 6.198,4.089 7.295,4.089 7.955,4.75 8.811,4.75 J1.4
  Bottom Layer w0.152: U1.12 1.129,1.45 1.422,1.743 1.422,2.359 2.731,3.667 5.07,3.667 5.375,3.363 v1(5.471,3.363)
T+: J1.6 J2.1 RT1.1 | length 28.3
  Top Layer w0.381: v1(7.734,1.796) 8.528,2.589 9.353,2.589 J1.6
  Bottom Layer w0.381: J2.1 -8.559,2.464 -7.823,2.464 -6.02,4.267 -6.02,6.325 -2.921,9.423 0.091,9.423 3.126,6.388 3.289,6.388 6.068,3.61 6.068,3.447 7.081,2.433 7.244,2.433 7.244,2.286 v1(7.734,1.796) 7.768,1.796 7.836,1.728 8.29,1.728 8.385,1.823 8.819,1.823 RT1.1@8.882,1.76
T-: J1.5 J2.2 RT1.2 | length 24.7
  Top Layer w0.381: v1(7.653,2.996) 8.486,3.829 9.19,3.829 J1.5
  Bottom Layer w0.381: J2.2 -4.851,10.592 0.22,10.592 7.628,3.183 7.628,3.02 v1(7.653,2.996) ; v1@7.825,2.817 RT1.2
pads on no net: J2.3 U1.1 U1.2 U1.3 U1.6 U1.9 U1.14 U1.15 U2.4

## Polygon pours and split planes (outlines as drawn)
3v3 on Bottom Layer "3V3_L02_P001" (solid, pour order 1): -20.152,19.695 19.848,19.695 19.848,-20.305 -20.152,-20.305
GND on Top Layer "GND_L01_P000" (solid, pour order 0): -20.057,19.929 19.943,19.929 19.943,-20.071 -20.057,-20.071

## Silkscreen, mask and mechanical layers (free items; w line width, h text height)
Top Overlay:
  text "RED=MGL" at -2.87,11.557 h0.76
  text "YLW=MGH" at -2.896,9.957 h0.76
  text "T-" at -12.954,5.969 h0.76
  text "T+" at -12.903,2.667 h0.76
  text "ADA '.PCBPN'" at -6,-11.75 h0.76
Bottom Overlay:
  lines w0.152: -5.588,12.319 -5.588,13.208 -4.699,13.208
  text "ADA '.PCBPN'" at 5.5,-11.75 h0.76
(M3) Board Outline:
  the board outline again, w0.254
(M4) FAB Notes:
  drawing of 211 lines, arcs and shapes, not listed
  text "1" at -42.518,95.091 h1.78
  text "2" at 27.349,95.091 h1.78
  text "3" at 97.072,95.091 h1.78
  text "4" at 166.948,95.091 h1.78
  text "A" at -74.937,69.234 h1.78
  text "Layer" at -26.125,58.429 h0.76
  text "Name" at -20.919,58.429 h0.76
  text "Material" at -9.111,58.429 h0.76
  text "Thickness" at -2.001,58.429 h0.76
  text "Constant" at 6.252,58.429 h0.76
  text "Board Layer Stack" at 13.489,58.429 h0.76
  text "Top Overlay" at -20.919,56.905 h0.76
  text "Top Solder" at -20.919,55.381 h0.76
  text "SM-003" at -9.111,55.381 h0.76
  text "1.00mil" at -2.001,55.381 h0.76
  text "4" at 6.252,55.381 h0.76
  text "1" at -26.125,53.857 h0.76
  text "Top Layer" at -20.919,53.857 h0.76
  text "1.35mil" at -2.001,53.857 h0.76
  text "Core1" at -20.919,52.333 h0.76
  text "370HR" at -9.111,52.333 h0.76
  text "61.02mil" at -2.001,52.333 h0.76
  text "4.6" at 6.252,52.333 h0.76
  text "2" at -26.125,50.809 h0.76
  text "Bottom Layer" at -20.919,50.809 h0.76
  text "1.35mil" at -2.001,50.809 h0.76
  text "Bottom Solder" at -20.919,49.285 h0.76
  text "SM-003" at -9.111,49.285 h0.76
  text "1.00mil" at -2.001,49.285 h0.76
  text "4" at 6.252,49.285 h0.76
  text "Bottom Overlay" at -20.919,47.761 h0.76
  text "B" at -74.937,15.259 h1.78
  text "B" at 199.383,15.259 h1.78
  text "1. FABRICATE TO MEET IPC-2221, IPC-6011, AND IPC-6012 (LATEST REVISIONS) CLASS 2, EXCEPT WHERE OTHERWISE SPECIFIED. /  / 2A. THERE ARE NO IMPEDANCE REQUIREMENTS FOR THIS BOARD. /  / 3A. MATERIAL: COPPER CLAD LAMINATE AND PREPREG PER IPC-4101/126, IPC-4101/130, OR IPC-4101/131 (LATEST REVISION). 370HR MEETS THIS REQUIREMENT. PCB LAMINATE SHALL BE ROHS AND REACH COMPLIANT. /  / 4. COPPER WEIGHT: COPPER LAYERS SHALL MATCH STACKUP TABLE WITH COPPER THICKNESS PER IPC-4562 (LATEST REVISION). /  / 5. FINAL BOARD THICKNESS SHALL BE ±10% OF STACKUP TABLE, INCLUDING OUTER COPPER LAYERS. /  / 6A. THIEVING PATTERN SHALL NOT BE ADDED TO THE PCB UNLESS SPECIFICALLY APPROVED IN WRITING. /  / 7. ALL DIMENSIONS, INCLUDING HOLE SIZE DIMENSIONS, APPLY AFTER PLATING. /  / 8. FINAL CONDUCTOR WIDTH SHALL BE ±20% OF DATA. /  / 9. LAYER TO LAYER REGISTRATION SHALL BE WITHIN 0.15MM (0.005 IN) OF DATA. /  / 10. ALL HOLES SHALL BE LOCATED WITHIN ±0.003 INCHES OF SPECIFIED COORDINATES. /  / 11. PLATING SHALL BE ENIG PER IPC-4552 (LATEST REVISION). /  / 12. SOLDER MASK BOTH SIDES PER IPC-SM-840 (LATEST REVISION), CLASS T OR FT, COLOR GREEN. /  / 13. BOARDS SHALL BE ELECTRICALLY TESTED USING SUPPLIED IPC-D-356 NETLIST. /  / 14. SUPPLIER SHALL MARK STACKUP AND DATE CODE, SUPPLIER NAME AND/OR TRADEMARK, AND UL FLAMMABILITY RATING IN NON-CONDUCTIVE INDELIBLE INK (COLOR WHITE OR BLACK). SUPPLIER SHALL NOT ADD ANY TEXT OR MARKING IN COPPER. /  / 15. SILKSCREEN OVER SOLDER MASK SHALL BE COLOR WHITE. /  / 16. THE MATERIALS AND PROCESS USED TO FABRICATE THIS PART ARE TO BE CONSISTENT WITH THE DIRECTIVE 2011/65/EU RESTRICTION OF HAZARDOUS SUBSTANCES IN ELECTRICAL AND ELECTRONIC EQUIPMENT (ROHS).   THE FINISHED PART TO BE ACCOMPANIED BY A SIGNED CERTIFICATE OF COMPLIANCE TO DIRECTIVE 2011/65/EU. /  / 17 IF ANY REACH SVHC’S ARE UTILIZED IN THE MATERIALS AND/OR PROCESS USED TO FABRICATE THIS PART, THE WEIGHT OF THE SVHC’S MUST BE PROVIDED. /  / 18 A CONFLICT MINERALS REPORTING TEMPLATE (CMRT) MUST BE AVAILABLE UPON REQUEST AT A PART LEVEL FOR ALL SUPPLIED PARTS." at 86.734,-10.192 h2.03
  text "C" at -74.937,-38.716 h1.78
  text "C" at 199.383,-38.716 h1.78
  text "D" at -74.937,-92.564 h1.78
  text "D" at 199.383,-92.564 h1.78
  text "1" at -42.518,-115.729 h1.78
  text "2" at 27.349,-115.729 h1.78
  text "3" at 97.072,-115.729 h1.78
  text "4" at 166.948,-115.729 h1.78
(M9) Unused:
  lines w0.013: -12,15 12,15 ; -1.5,-1.5 -1.5,1.5 1.5,1.5 1.5,-1.5 -1.5,-1.5
  lines w0.025: -12.021,-12.021 -12.021,-9.227 ; -1.5,0 1.5,0 ; 0,-1.5 0,1.5
Drill Drawing:
  circle w0.127: c-51.326,-49.022 r0.564
  lines w0.127: -52.889,-57.969 52.695,-57.969 ; -52.889,-47.809 52.695,-47.809 ; -43.697,-60.509 -43.697,-45.269 ; -34.809,-60.509 -34.809,-45.269 ; -16.441,-60.509 -16.441,-45.269 ; -8.011,-60.509 -8.011,-45.269 ; 4.279,-60.509 4.279,-45.269 ; 29.587,-60.509 29.587,-45.269 ; 39.44,-60.509 39.44,-45.269 ; -52.889,-60.509 52.695,-60.509 52.695,-45.269 -52.889,-45.269 -52.889,-60.509 ; -51.89,-56.925 -51.608,-56.925 -51.326,-57.207 -51.043,-56.925 -50.761,-56.925 -51.043,-56.642 -50.761,-56.36 -51.043,-56.36 -51.326,-56.078 -51.608,-56.36 -51.89,-56.36 -51.608,-56.642 -51.89,-56.925 ; -51.89,-54.667 -51.326,-54.385 -50.761,-54.667 -51.043,-54.102 -50.761,-53.538 -51.326,-53.82 -51.89,-53.538 -51.608,-54.102 -51.89,-54.667 ; -51.89,-52.127 -50.761,-52.127 -50.761,-50.998 -51.89,-50.998 -51.89,-52.127
  text "Symbol" at -51.365,-47.047 h1.22
  text "Count" at -42.935,-47.047 h1.22
  text "Hole Size" at -34.047,-47.047 h1.22
  text "Plated" at -15.679,-47.047 h1.22
  text "Hole Type" at -7.249,-47.047 h1.22
  text "Drill Layer Pair" at 5.041,-47.047 h1.22
  text "Via/Pad" at 30.349,-47.047 h1.22
  text "Pad Shape" at 40.202,-47.047 h1.22
  text "1" at -42.935,-49.587 h1.02
  text "51.18mil (1.300mm)" at -34.047,-49.587 h1.02
  text "NPTH" at -15.679,-49.587 h1.02
  text "Round" at -7.249,-49.587 h1.02
  text "Top Layer - Bottom Layer" at 5.041,-49.587 h1.02
  text "Pad" at 30.349,-49.587 h1.02
  text "Rounded" at 40.202,-49.587 h1.02
  text "2" at -42.935,-52.127 h1.02
  text "47.24mil (1.200mm)" at -34.047,-52.127 h1.02
  text "PTH" at -15.679,-52.127 h1.02
  text "Round" at -7.249,-52.127 h1.02
  text "Top Layer - Bottom Layer" at 5.041,-52.127 h1.02
  text "Pad" at 30.349,-52.127 h1.02
  text "(Mixed)" at 40.202,-52.127 h1.02
  text "3" at -42.935,-54.667 h1.02
  text "84.65mil (2.150mm)" at -34.047,-54.667 h1.02
  text "PTH" at -15.679,-54.667 h1.02
  text "Round" at -7.249,-54.667 h1.02
  text "Top Layer - Bottom Layer" at 5.041,-54.667 h1.02
  text "Pad" at 30.349,-54.667 h1.02
  text "Rounded" at 40.202,-54.667 h1.02
  text "12" at -42.935,-57.207 h1.02
  text "12.00mil (0.305mm)" at -34.047,-57.207 h1.02
  text "PTH" at -15.679,-57.207 h1.02
  text "Round" at -7.249,-57.207 h1.02
  text "Top Layer - Bottom Layer" at 5.041,-57.207 h1.02
  text "Via" at 30.349,-57.207 h1.02
  text "Rounded" at 40.202,-57.207 h1.02
  text "18 Total" at -42.935,-59.747 h1.02